# Altium PCB SW-SMD_TM-2022-3.pcbdoc
Units mm, origin at the board's own origin, x right, y up, seen from the top; angles counter-clockwise.
Board outline 25.66 x 26.45 mm, 2 copper layers (Top Layer, Bottom Layer); 1 components, 0 nets, 5 pads, 0 vias.
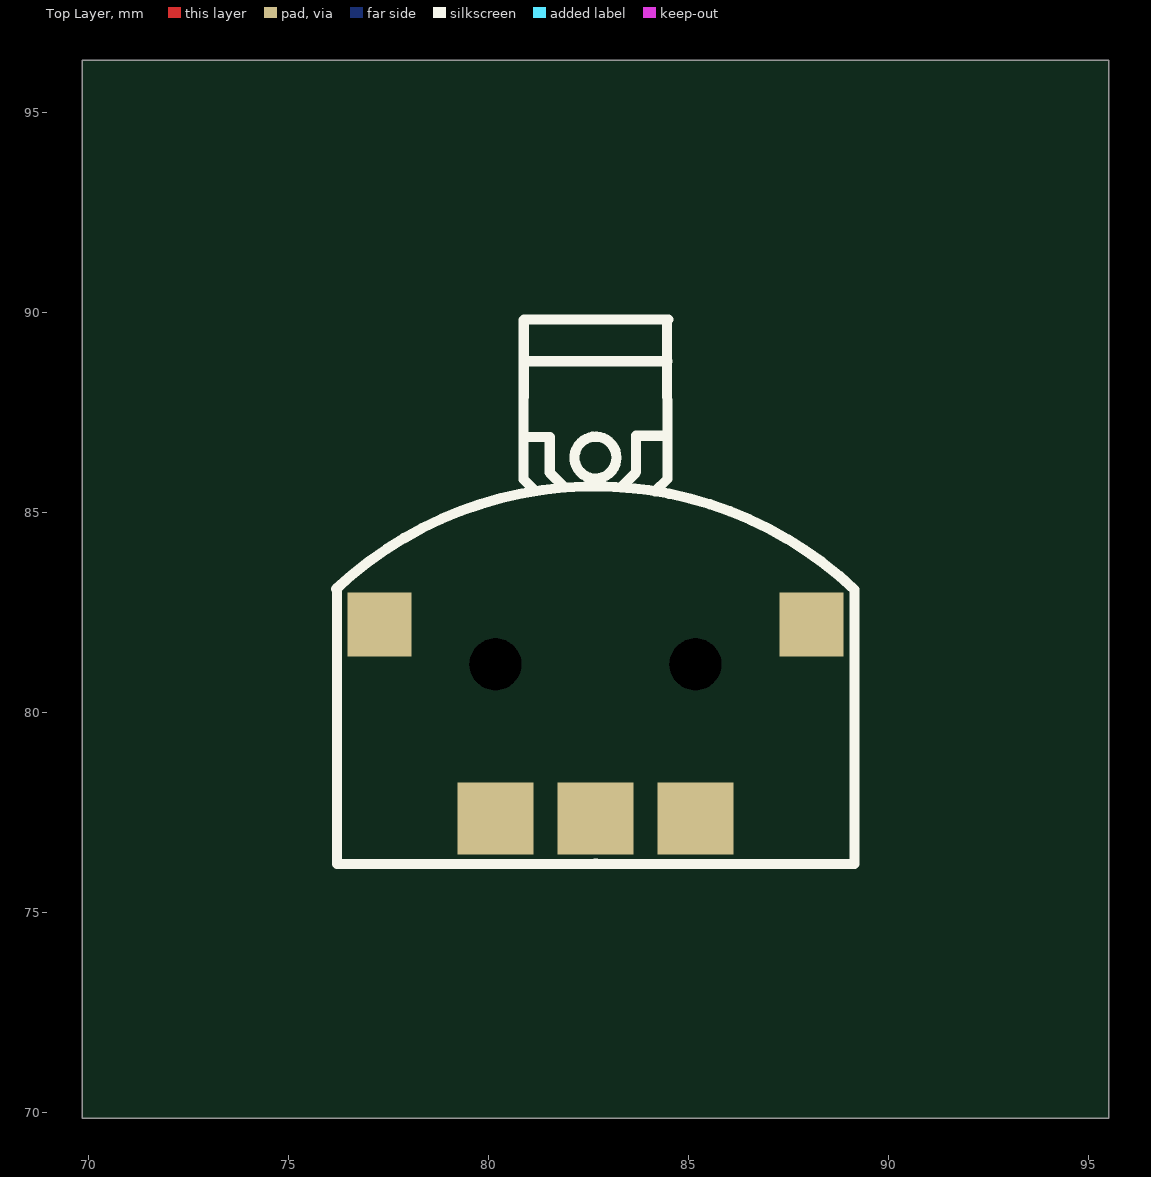
[diagram p0: Top Layer view]
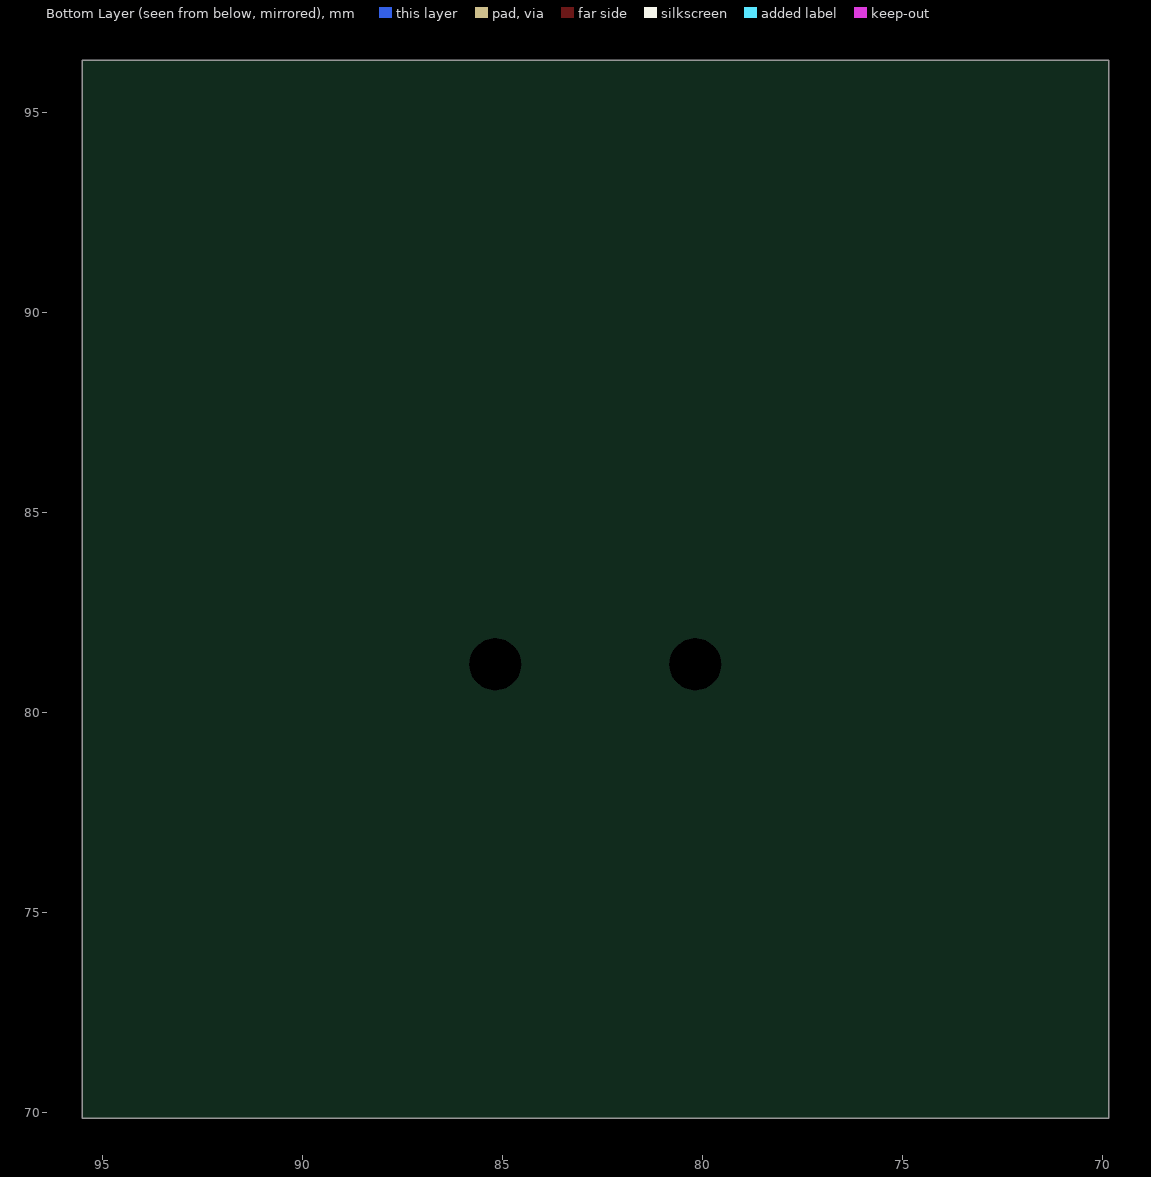
[diagram p1: Bottom Layer view, seen from below]

## Layer stack, top to bottom
Top Layer: signal copper (thickness not stored)
Dielectric: dielectric 0.32, FR-4, Dk 4.8
Bottom Layer: signal copper (thickness not stored)

## Board outline
95.509,69.85 69.85,69.85 69.85,96.295 95.509,96.295

## Components (designator, comment, footprint, x,y, rotation, side; value= is the part's Value field where it differs from the comment)
? "SW-SMD_TM-2022-3" SW-SMD_TM-2022-3 82.682,79.768 r0 top

## Footprints (in the part's own frame and the unit in brackets; to place one, negate y for a bottom-side part, rotate by r counter-clockwise, add the part's x,y. Pads: shape width x height; smd on the part's side, far side on the other; paste and mask are expansions set on the pad)
SW-SMD_TM-2022-3 [mm]
  rect 1.6x1.6 smd: a(-5.4,2.425) a(5.4,2.425)
  rect 1.9x1.8 smd: b(2.5,-2.425) c(0,-2.425) d(-2.5,-2.425)
  Multi-Layer board cut-out: 3.15,1.425 3.086,1.707 2.905,1.933 2.645,2.059 2.355,2.059 2.095,1.933 1.914,1.707 1.85,1.425 1.85,1.425 1.914,1.143 2.095,0.917 2.355,0.791 2.645,0.791 2.905,0.917 3.086,1.143 3.15,1.425
  Multi-Layer board cut-out: -1.85,1.425 -1.914,1.707 -2.095,1.933 -2.355,2.059 -2.645,2.059 -2.905,1.933 -3.086,1.707 -3.15,1.425 -3.15,1.425 -3.086,1.143 -2.905,0.917 -2.645,0.791 -2.355,0.791 -2.095,0.917 -1.914,1.143 -1.85,1.425
  silkscreen extent -6.48,-3.57 6.48,10.04

## Nets (pads, with @x,y where several pads share a name; then routed paths per layer and width w, separated by ;. In a path a pad name is that pad's centre, name@x,y a point inside that pad or via, vN(x,y) a via of type N, cw(c..) or ccw(c..) an arc to the next point about the centre after c; other vN are vias at no path point)
pads on no net: ?.a ?.b ?.c ?.d